# Altium PCB reflex_brainboard_RevG.PcbDoc (part 1 of 2)
Units mil, origin at the board's own origin, x right, y up, seen from the top; angles counter-clockwise.
Board outline 1299.21 x 1692.91 mil, 4 copper layers (Top Layer, Ground pour, PowerPour, Bottom Layer), stack 61.2 mil thick; 127 components, 95 nets, 488 pads, 161 vias.
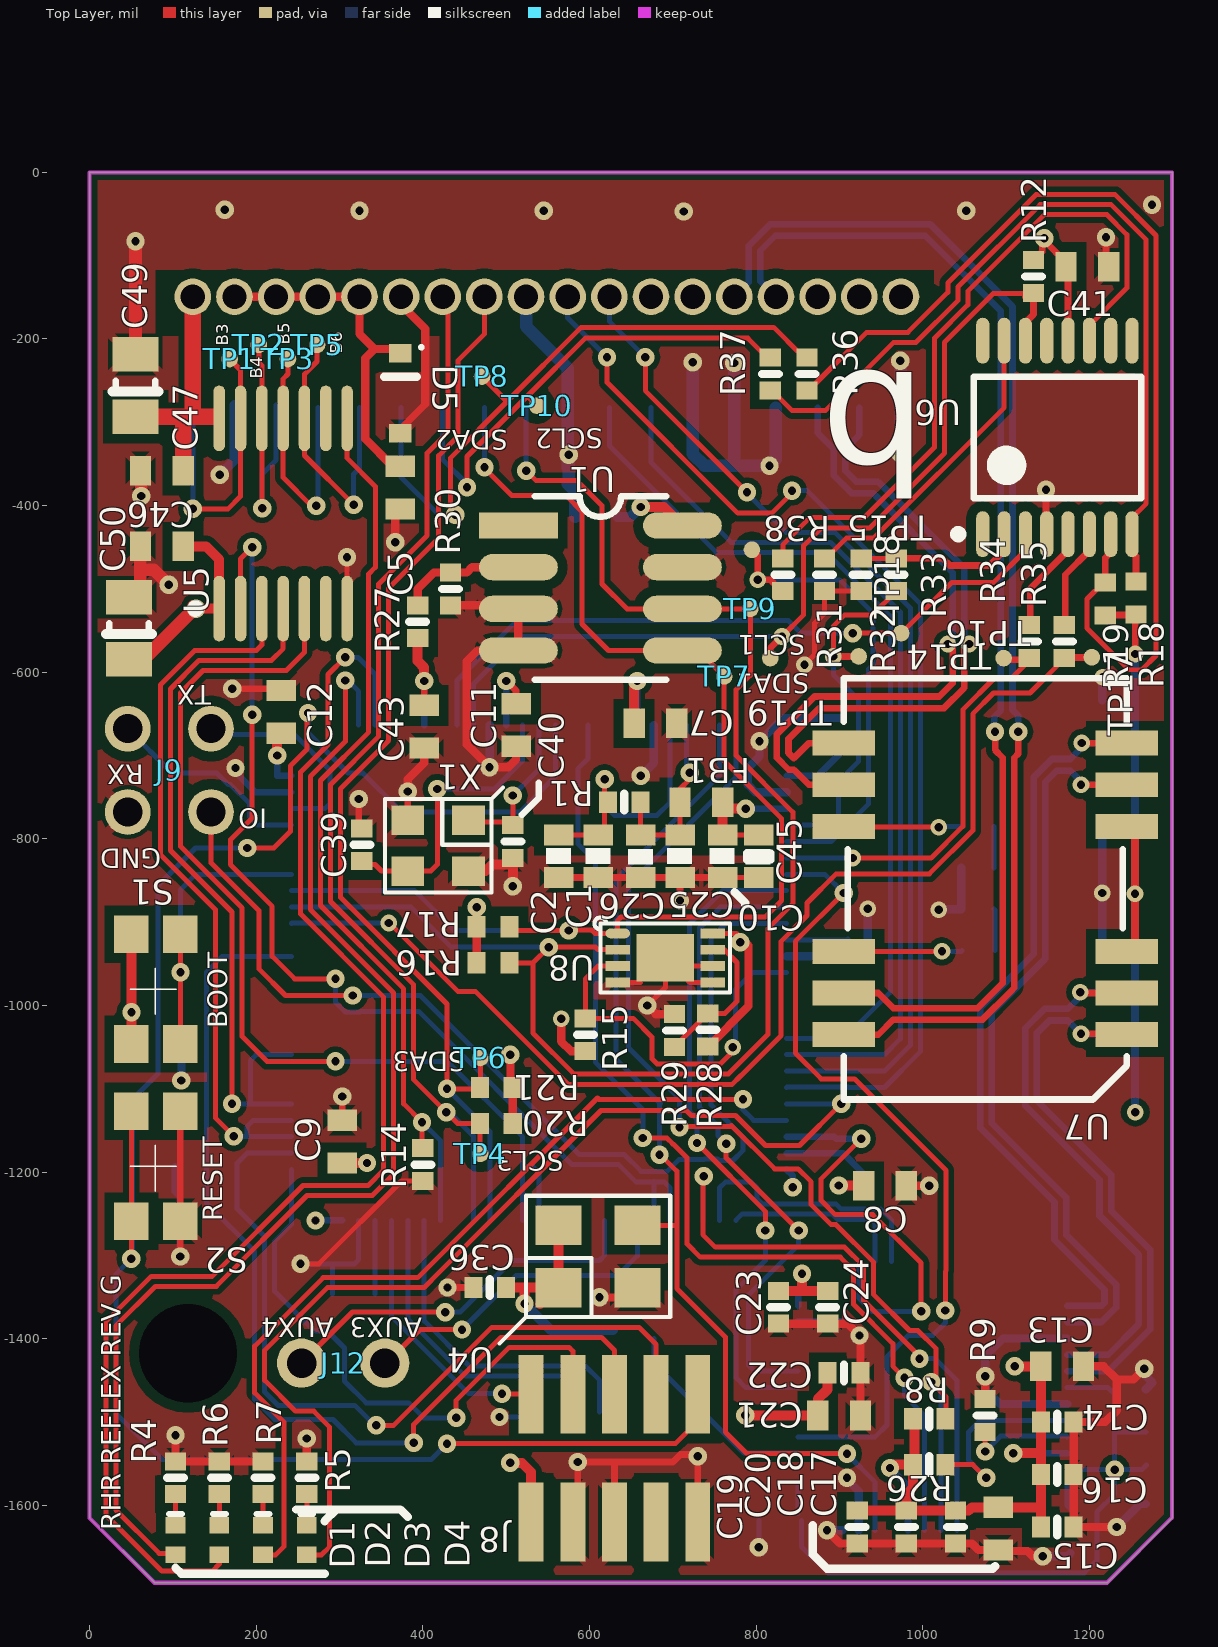
[diagram p0: Top Layer view]
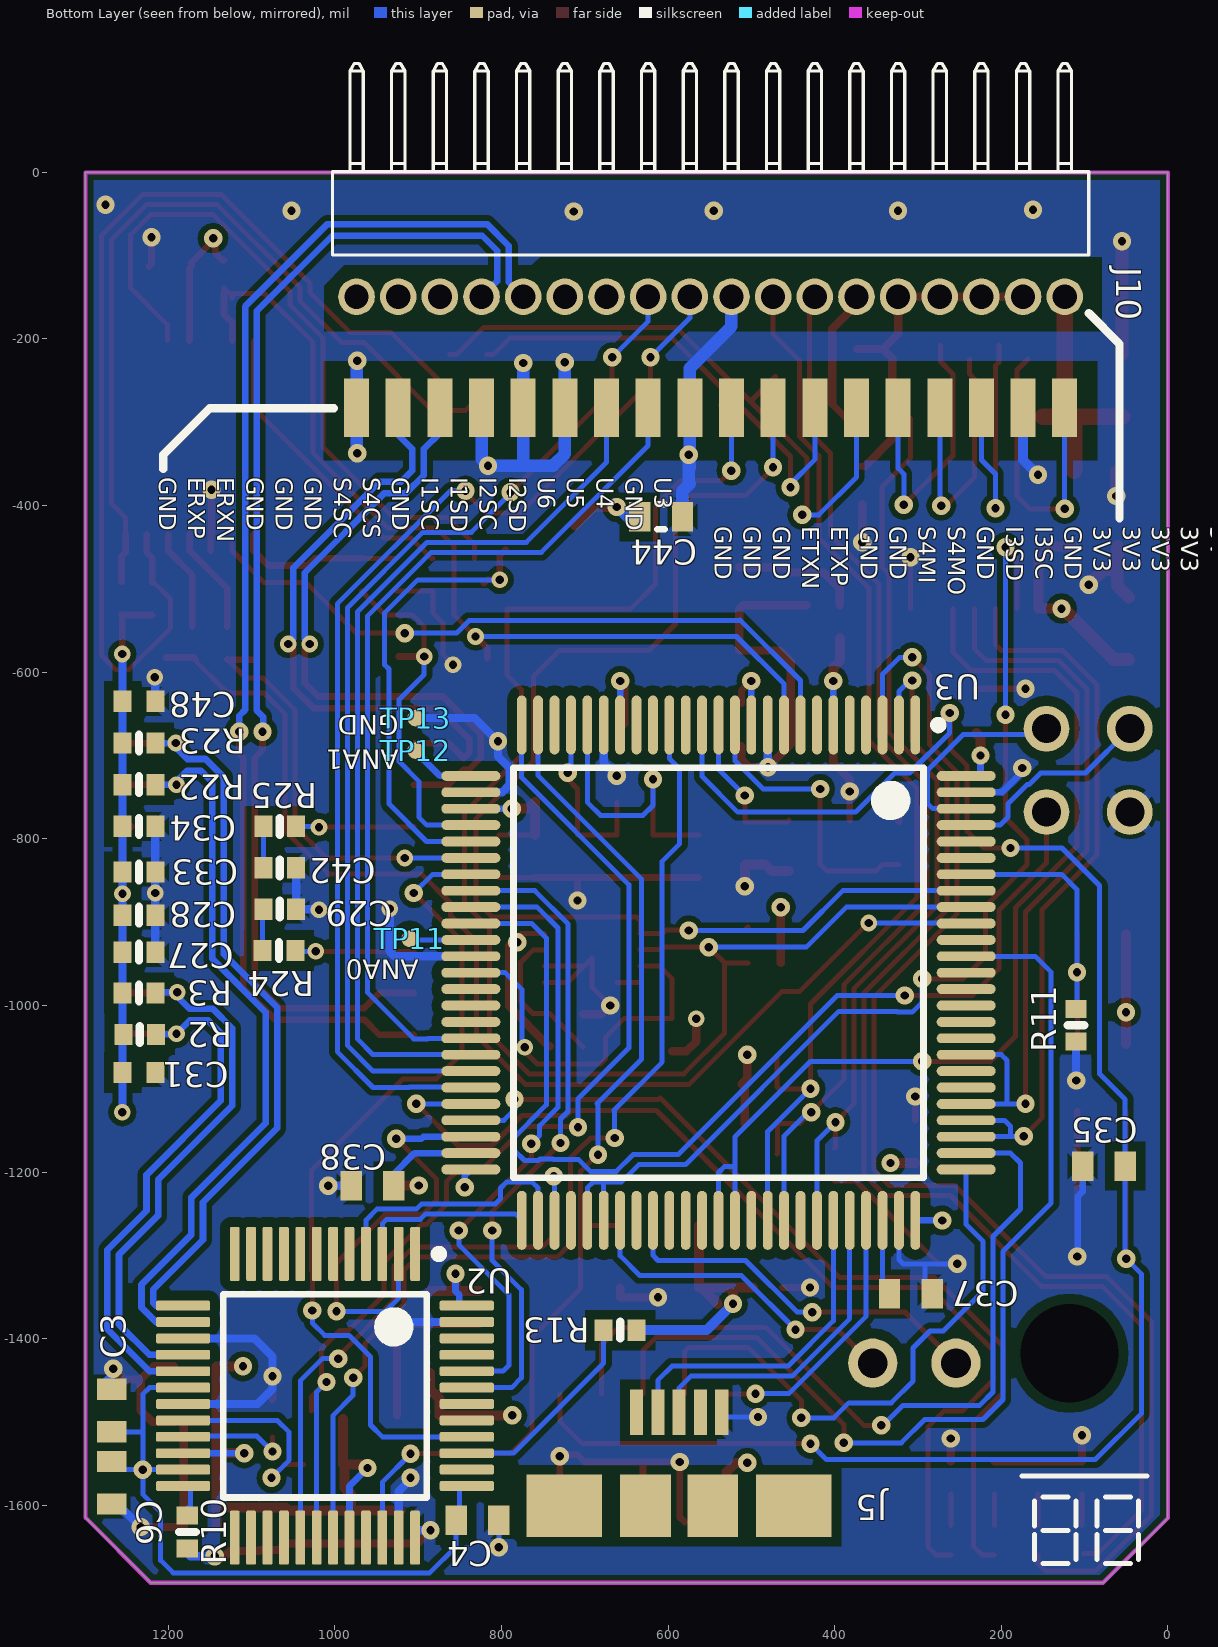
[diagram p1: Bottom Layer view, seen from below]
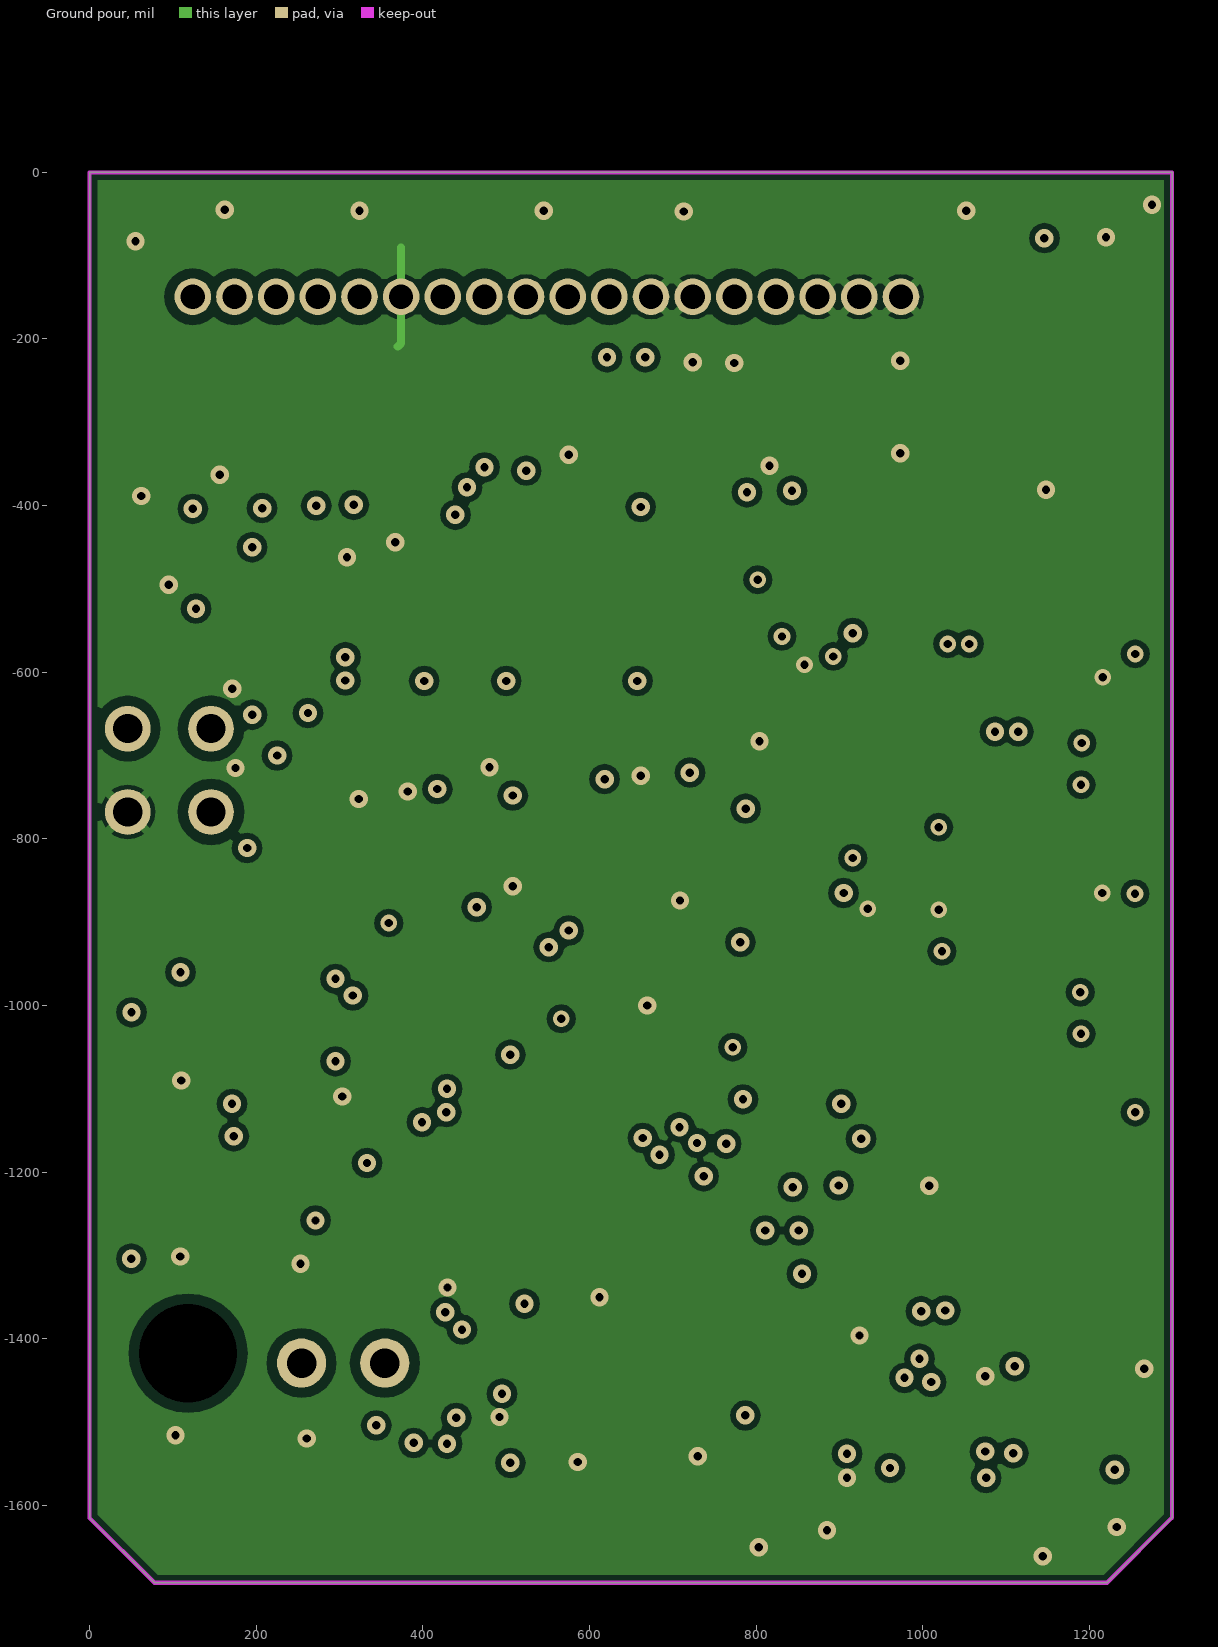
[diagram p2: Ground pour]
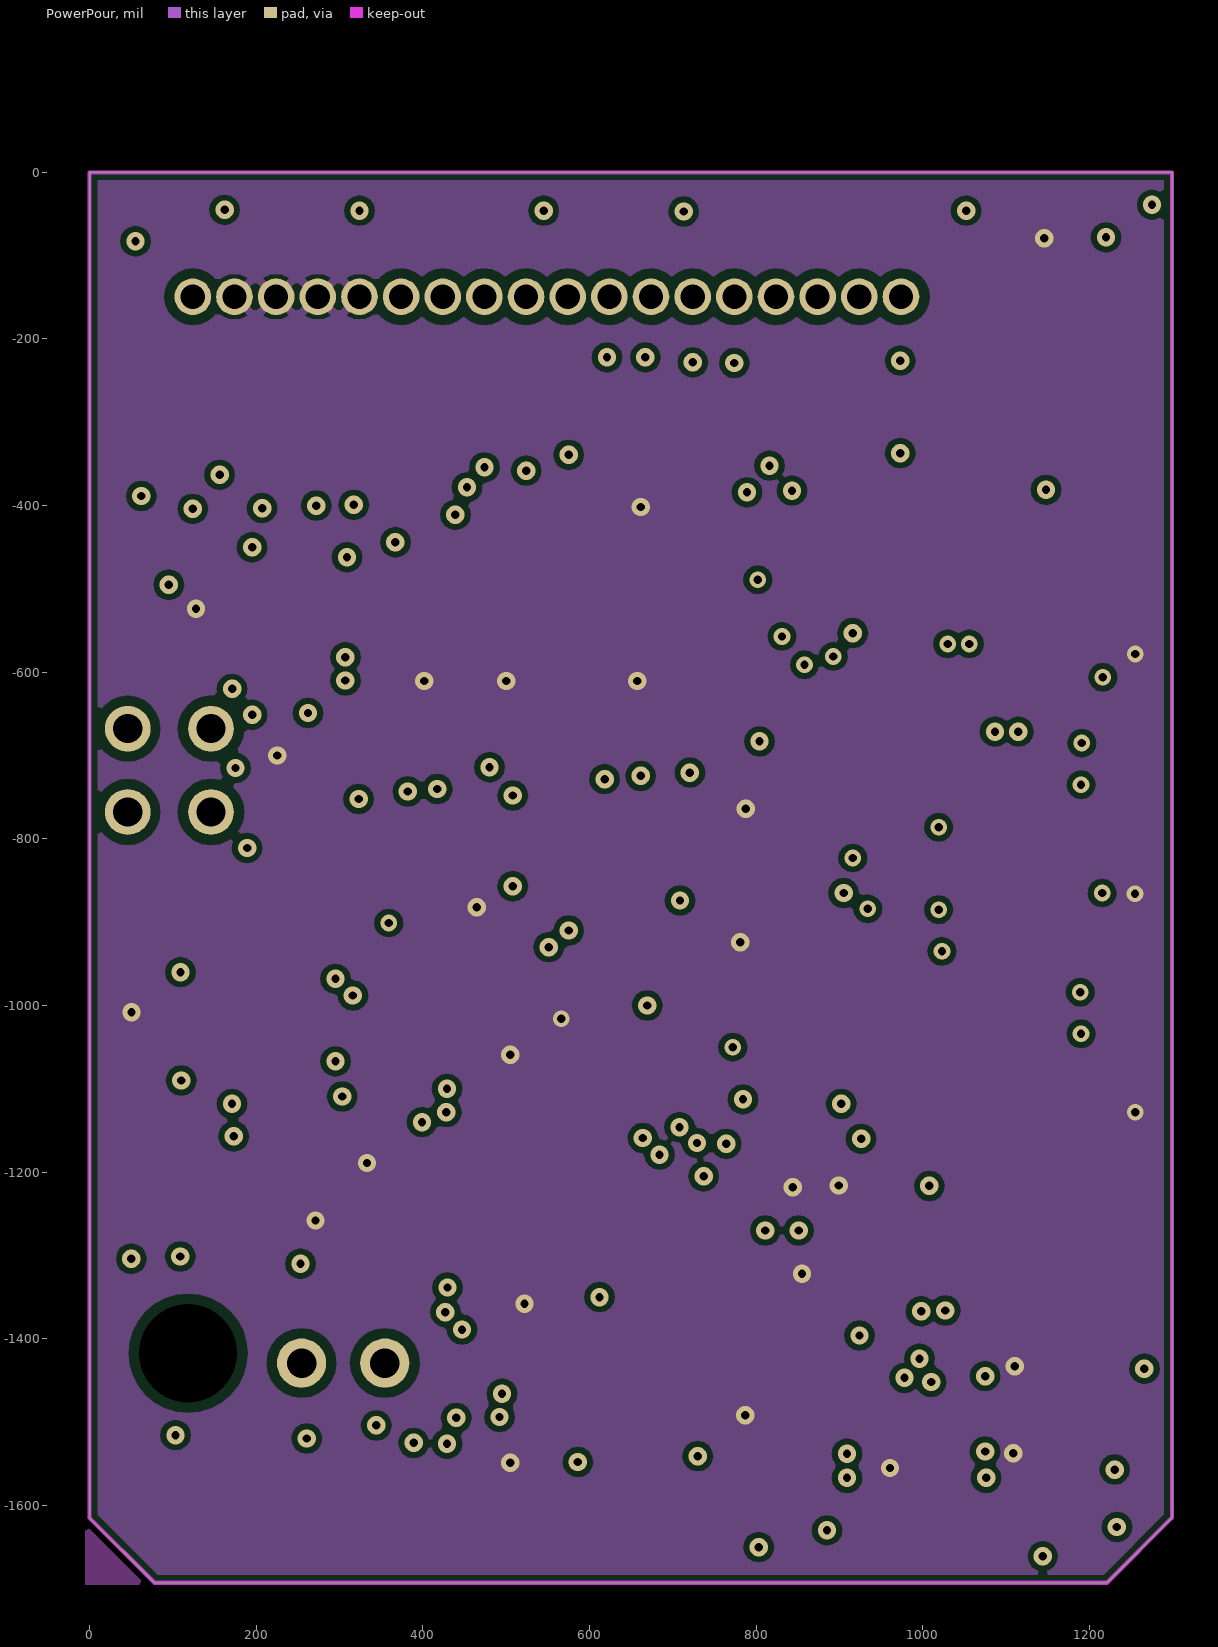
[diagram p3: PowerPour]

## Layer stack, top to bottom
Top Solder: solder mask 0.4, Solder Resist, Dk 3.5
Top Layer: signal copper 1.4
Dielectric 1: core 25, FR-4, Dk 4.2
Ground pour: signal copper 1.417
Dielectric 3: core 25.566, Dk 4.2
PowerPour: signal copper 1.417
Dielectric 4: prepreg 5, Dk 4.2
Bottom Layer: signal copper 1.4
Bottom Solder: solder mask 0.4, Solder Resist, Dk 3.5

## Board outline
0,-1615 77.91,-1692.91 1221.09,-1692.91 1299.21,-1614.79 1299.21,0 0,0

## Design rules (kind name [scope] priority, off if disabled: settings)
Clearance Clearance_Poly [InPoly] p1: gap=7 ignorepadtopadclearanceinfootprint=FALSE except(0: Arc-Hole Track-Hole SMDPad-Hole THPad-Hole Via-Hole Fill-Hole Poly-Hole Region-Hole Text-Hole; 12: SMDPad-Poly THPad-Poly)
Clearance [All] p2: gap=6 ignorepadtopadclearanceinfootprint=FALSE except(0: Arc-Hole Track-Hole SMDPad-Hole THPad-Hole Via-Hole Fill-Hole Poly-Hole Region-Hole Text-Hole)
DiffPairsRouting [All] p1: maxlimit=10 minlimit=6 mostfreqgap=6 toplayer_minwidth=7.87 toplayer_maxwidth=15 toplayer_prefwidth=15 midlayer1_minwidth=7.87 midlayer1_maxwidth=15 midlayer1_prefwidth=15 midlayer2_minwidth=7.87 midlayer2_maxwidth=15 midlayer2_prefwidth=15 bottomlayer_minwidth=7.87 bottomlayer_maxwidth=15 bottomlayer_prefwidth=15 maxuncoupledlength=500
HoleSize [All] p1: absolutevalues=TRUE maxlimit=11811.02 minlimit=1 maxpercent=80.000 minpercent=20.000
MinimumAnnularRing [All] p1: minimumring=5
MinimumSolderMaskSliver [All] p1: minsoldermaskwidth=0
PlaneClearance [All] p1: clearance=10
PlaneConnect [All] p1: planeconnectstyle=Relief reliefexpansion=10 reliefentries=4 reliefconductorwidth=12 reliefairgap=5
PolygonConnect via_connect [IsVia] p1: connectstyle=Direct reliefconductorwidth=10 reliefentries=4 polygonreliefangle="90 Angle" airgapwidth=10
PolygonConnect [All] p2: connectstyle=Relief reliefconductorwidth=10 reliefentries=4 polygonreliefangle="45 Angle" airgapwidth=5
RoomDefinition reflex_brainboard_RevG [InComponentClass('reflex_brainboard_RevG')] p1 off: confinementstyle=ConfineIn formatcopy=TRUE lockcomponents=FALSE outline -8,240 0,232 1309,232 1309,-1981 1302,-1988 -16,-1988
RoutingVias [All] p1: holewidth=10 width=20 viastyle="Through Hole" minholewidth=10 minwidth=20 maxholewidth=28 maxwidth=50
SilkToBoardRegionClearance [All] p1 off:
SilkToSilkClearance [All] p1 off: silktosilkclearance=10
SilkToSolderMaskClearance [IsPad] p1: minsilkscreentomaskgap=0 clearancetoexposedcopper=TRUE
SolderMaskExpansion [All] p1: expansion=2 istentingtop=FALSE
Width [All] p1: maxlimit=100 minlimit=6 preferedwidth=8 midlayer1_minwidth=8 midlayer2_minwidth=8 minimp=50.000000 maximp=50.000000 favimp=50.000000
22 further rules are at their usual default settings.

## Classes and differential pairs
differential pair ETH_RX: +ETH_RX_P -ETH_RX_N
differential pair ETH_TX: +ETH_TX_P -ETH_TX_N
differential pair PHY_RX: +PHY_RX_P -PHY_RX_N
differential pair PHY_TX: +PHY_TX_P -PHY_TX_N

## Components (designator, comment, footprint, x,y, rotation, side; value= is the part's Value field where it differs from the comment)
C1 "0.1uF 25V" GENERIC_0603#1 610.24,-846.46 r90 top locked
C2 "Cap_0603_10uF" GENERIC_0603#1 562.99,-846.46 r90 top locked value=10u
C3 "0.1uF 25V" GENERIC_0603#1 1267.72,-1511.81 r90 bottom locked
C4 "0.1uF 25V" GENERIC_0603#1 803.15,-1618.11 r0 bottom locked
C5 "Cap_0603_10uF" GENERIC_0603#1 373,-404 r90 top value=10u
C6 "Cap_0603_10uF" GENERIC_0603#1 1267.72,-1598.43 r90 bottom value=10u
C7 "0.1uF 25V" GENERIC_0603#1 704.72,-661.42 r180 top locked
C8 "0.1uF 25V" GENERIC_0603#1 980.32,-1216.54 r180 top locked
C9 "0.1uF 25V" GENERIC_0603#1 303.15,-1137.8 r270 top locked
C10 "0.1uF 25V" GENERIC_0603#1 759.84,-846.46 r90 top locked
C11 "0.1uF 25V" GENERIC_0603#1 511.81,-688.98 r90 top locked
C12 "0.1uF 25V" GENERIC_0603#1 230,-622 r270 top locked
C13 "Cap_0603_10uF" GENERIC_0603#1 1192.91,-1433.07 r180 top locked value=10u
C14 "0.01uF" Generic_0402 1161.42,-1500 r180 top locked
C15 "0.001uF" Generic_0402 1161.42,-1625.98 r180 top locked
C16 "100pF" Generic_0402 1161.42,-1562.99 r180 top locked
C17 "Cap_0603_10uF" GENERIC_0603#1 1090.55,-1653.54 r90 top locked value=10u
C18 "0.01uF" Generic_0402 1039.37,-1625.98 r90 top locked
C19 "0.001uF" Generic_0402 921.26,-1625.98 r90 top locked
C20 "100pF" Generic_0402 980.31,-1625.98 r90 top locked
C21 "Cap_0603_10uF" GENERIC_0603#1 925.2,-1492.13 r180 top locked value=10u
C22 "0.01uF" Generic_0402 905.51,-1440.94 r180 top locked
C23 "0.001uF" Generic_0402 826.77,-1362.2 r90 top locked
C24 "100pF" Generic_0402 885.83,-1362.2 r90 top locked
C25 "0.1uF 25V" GENERIC_0603#1 708.66,-846.46 r90 top locked
C26 "Cap_0603_10uF" GENERIC_0603#1 661.42,-846.46 r90 top locked value=10u
C27 "1u" Generic_0402 1235,-936 r0 bottom
C28 "0.1uF" Generic_0402 1235,-891.48 r0 bottom value="0.1uF 50V"
C29 "0.001uF" Generic_0402 1066,-884.33 r0 bottom
C31 "0.1uF" GENERIC_0402 1235,-1080.42 r0 bottom value="0.1uF 50V"
C33 "1u" Generic_0402 1235,-839.86 r0 bottom
C34 "0.1uF" Generic_0402 1235,-785 r0 bottom value="0.1uF 50V"
C35 "0.1uF 25V" GENERIC_0603#1 102.36,-1192.91 r180 bottom locked
C36 "0.01uF" Generic_0402 480.32,-1338.58 r0 top locked
C37 "2.2uF 10V" GENERIC_0603#1 283,-1346 r0 bottom locked
C38 "2.2uF 10V" GENERIC_0603#1 980.31,-1216.54 r180 bottom locked
C39 "18pF" Generic_0402 326.77,-807.09 r90 top locked
C40 "18pF" Generic_0402 507.87,-803.15 r270 top locked
C41 "2.2uF 10V" GENERIC_0603#1 1223.18,-113 r180 top
C42 "0.001uF" Generic_0402 1066,-834.67 r0 bottom
C43 "0.1uF 25V" GENERIC_0603#2 401.57,-665.35 r90 top locked
C44 "0.1uF 25V" Generic_0603 582.68,-413.39 r0 bottom locked
C45 "0.1uF 25V" Generic_0603 803.15,-846.46 r90 top locked
C46 "0.1uF 25V" GENERIC_0603#2 86.61,-448.82 r180 top locked
C47 "0.1uF 25V" GENERIC_0603#2 86.61,-358.27 r0 top locked
C48 "0.1uF" GENERIC_0402 1235,-635 r0 bottom value="0.1uF 50V"
C49 "10uF" GENERIC_0805P 55.12,-255.91 r90 top locked
C50 "10uF" GENERIC_0805P 47.24,-547.24 r90 top locked
D1 "LED White" 0402_LED_WHITE 103.12,-1641.73 r0 top locked value=White
D2 "LED White" 0402_LED_WHITE 155.61,-1641.73 r0 top locked value=White
D3 "LED White" 0402_LED_WHITE 208.1,-1641.73 r0 top locked value=White
D4 "LED White" 0402_LED_WHITE 260.6,-1641.73 r0 top locked value=White
D5 "ESDLC3V3D3-TP" SOD-323 373,-265 r270 top
FB1 "MPZ1608S221A" GENERIC_0603#1 759.84,-755.91 r180 top locked
J5 "10104110-0001LF" FCI-10104110 586.61,-1488.19 r180 bottom locked
J8 "DNP" CNCTECH_3220-10-0300-00 629.92,-1543.31 r90 top locked
J9 "67996-104HLF" HDR2X2 145.67,-767.72 r90 top locked
J10 "FTSH-118-01-L-MT" FTSH-118-01-L-MT 548.82,-149.29 r180 bottom locked
J12 "77311-118-02LF" HDR1X2 354.33,-1429.13 r180 top locked
R1 "10" Generic_0402 641.73,-755.91 r0 top locked
R2 "Res_0402_49p9_1pct" Generic_0402 1234,-1034.74 r0 bottom value=49p9
R3 "Res_0402_49p9_1pct" Generic_0402 1235,-985 r0 bottom value=49p9
R4 "330" Generic_0402 103.12,-1566.93 r270 top locked
R5 "330" Generic_0402 260.6,-1566.93 r270 top locked
R6 "330" Generic_0402 155.61,-1566.93 r270 top locked
R7 "330" Generic_0402 208.1,-1566.93 r270 top locked
R8 "Res_0402_2.2K" Generic_0402 1007.87,-1496.06 r0 top locked value=2.2K
R9 "Res_0402_10K_1pct" Generic_0402 1074.8,-1492.13 r270 top locked value=10K
R10 "4.87k 1%" Generic_0402 1177,-1632 r90 bottom locked
R11 "Res_0402_10K_1pct" Generic_0402 110.24,-1023.62 r90 bottom locked value=10K
R12 "Res_0402_10K_1pct" Generic_0402 1133,-125 r90 top value=10K
R13 "Res_0402_2.2K" Generic_0402 657.48,-1389.76 r180 bottom locked value=2.2K
R14 "Res_0402_10K_1pct" Generic_0402 400,-1191 r90 top locked value=10K
R15 "Res_0402_10K_1pct" Generic_0402 595,-1035.15 r270 top value=10K
R16 "Res_0402_2.2K" GENERIC_0402 484.25,-948.82 r180 top locked value=2.2K
R17 "Res_0402_2.2K" GENERIC_0402 484.25,-905.51 r180 top locked value=2.2K
R18 "Res_0402_2.2K" GENERIC_0402 1256,-511 r270 top value=2.2K
R19 "Res_0402_2.2K" GENERIC_0402 1219,-512 r270 top value=2.2K
R20 "Res_0402_2.2K" GENERIC_0402 488.19,-1141.73 r0 top locked value=2.2K
R21 "Res_0402_2.2K" GENERIC_0402 488.19,-1098.43 r0 top locked value=2.2K
R22 "Res_0402_49p9_1pct" Generic_0402 1235,-735 r180 bottom value=49p9
R23 "Res_0402_49p9_1pct" Generic_0402 1235,-685 r0 bottom value=49p9
R24 "75" Generic_0402 1067,-934 r0 bottom
R25 "75" Generic_0402 1066,-785 r0 bottom
R26 "Res_0402_2.2K" Generic_0402 1007.87,-1551.18 r180 top locked value=2.2K
R27 "Res_0402_DNP" Generic_0402 393.7,-539.37 r270 top locked value=DNP
R28 "Res_0402_DNP" Generic_0402 742.01,-1029.27 r270 top value=DNP
R29 "Res_0402_10K_1pct" Generic_0402 702,-1030 r270 top value=10K
R30 "Res_0402_10K_1pct" Generic_0402 433.07,-500 r90 top locked value=10K
R31 "Res_0402_10K_1pct" Generic_0402 882,-483 r90 top value=10K
R32 "Res_0402_DNP" Generic_0402 926,-483 r270 top value=DNP
R33 "Res_0402_0" Generic_0402 968,-483 r90 top value=0
R34 "Res_0402_49p9_1pct" Generic_0402 1128,-563 r90 top value=49p9
R35 "Res_0402_49p9_1pct" Generic_0402 1170,-563 r90 top value=49p9
R36 "Res_0402_49p9_1pct" Generic_0402 861,-242 r270 top value=49p9
R37 "Res_0402_49p9_1pct" Generic_0402 817,-242 r270 top value=49p9
R38 "Res_0402_49p9_1pct" Generic_0402 832,-483 r90 top value=49p9
S1 "EVP-AA402W" EVPAA402_switch 78.74,-980.31 r90 top locked
S2 "EVP-AA402W" EVPAA402_switch 78.74,-1192.91 r90 top locked
TP1 "SMT Pad" TP_PAD_20mil 168,-224 r90 top locked
TP2 "SMT Pad" TP_PAD_20mil 203,-207 r90 top locked
TP3 "SMT Pad" TP_PAD_20mil 238,-224 r90 top locked
TP4 "SMT Pad" TP_PAD_20mil 469,-1178 r90 top locked
TP5 "SMT Pad" TP_PAD_20mil 273,-207 r90 top locked
TP6 "SMT Pad" TP_PAD_20mil 469,-1063 r90 top locked
TP7 "SMT Pad" TP_PAD_20mil 761.63,-605 r90 top locked
TP8 "SMT Pad" TP_PAD_20mil 471,-245 r90 top
TP9 "SMT Pad" TP_PAD_20mil 793,-523.89 r90 top locked
TP10 "SMT Pad" TP_PAD_20mil 537,-280 r90 top
TP11 "SMT Pad" TP_PAD_20mil 910,-920 r180 bottom
TP12 "SMT Pad" TP_PAD_20mil 902.89,-694 r180 bottom
TP13 "SMT Pad" TP_PAD_20mil 902.89,-655 r180 bottom
TP14 "SMT Pad" TP_PAD_20mil 923,-581 r90 top
TP15 "SMT Pad" TP_PAD_20mil 795,-453 r90 top
TP16 "SMT Pad" TP_PAD_20mil 1097,-583 r90 top
TP17 "SMT Pad" TP_PAD_20mil 1203,-582 r90 top
TP18 "SMT Pad" TP_PAD_20mil 974,-553 r90 top
TP19 "SMT Pad" TP_PAD_20mil 817,-583 r90 top
U1 "CAT24M01WI-GT3" SOIC8 460.63,-381.89 r0 top locked
U2 "TLK110PT" PT0048A_M 1011.81,-1468.5 r270 bottom locked
U3 "STM32F427VIT6" STM-LQFP100_N 539.37,-960.63 r270 bottom locked
U4 "ASE-50.000MHZ-LCT" OSCILLATOR_3.2x2.5 562.99,-1338.58 r0 top locked
U5 "TXS0104EPWR" TXS0104EPWR 232.28,-409.45 r90 top locked
U6 "SC18IS600IPW/S8" SOT403-1-TSSOP16 1161.61,-318.14 r90 top
U7 "749020100" Wurth749020100 1075,-860 r180 top locked
U8 "MCP9804T" Temp_MCP9804T 633.86,-913.39 r270 top locked
X1 "8Z-25.000MEEQ-T" CRYSTAL_2_2.5 468.5,-767.72 r180 top locked

## Footprints (in the part's own frame and the unit in brackets; to place one, negate y for a bottom-side part, rotate by r counter-clockwise, add the part's x,y. Pads: shape width x height; smd on the part's side, far side on the other; paste and mask are expansions set on the pad)
0402_LED_WHITE [mm] "White LED land pattern"
  rect 0.6x0.5 smd paste+0 mask+0: 1(0,-0.45) 2(0,0.45)
  silkscreen extent -0.2,0.8 0.2,0.8
CNCTECH_3220-10-0300-00 [mm]
  rect 2.4x0.76 smd: 1(-1.95,2.54) 2(1.95,2.54) 3(-1.95,1.27) 4(1.95,1.27) 5(-1.95,0) 6(1.95,0) 7(-1.95,-1.27) 8(1.95,-1.27) 9(-1.95,-2.54) 10(1.95,-2.54)
  body extent -2.55,-5.6 2.55,5.6, height 5.4
CRYSTAL_2_2.5 [mm]
  rect 1x0.9 smd: 1(0.35,0.25) 2(2.2,0.25) 3(2.2,1.8) 4(0.35,1.8)
  silkscreen extent -0.7,-0.75 2.9,2.45, body extent 0.05,0.05 2.5,2, height 0.55
EVPAA402_switch [mm] "Reset Switch"
  rect 1.15x1.05 smd: 1(-1.675,0.725) 1_1(1.675,0.725) 2(-1.675,-0.763) 2_1(1.675,-0.763)
  silkscreen extent -0.76,-0.64 0.64,0.76, body extent -2.15,-1.56 2.15,1.55, height 1.65
FCI-10104110 [mm] "Micro USB B 2.0"
  rect 0.4x1.4 smd: 1(-1.3,0) 2(-0.65,0) 3(0,0) 4(0.65,0) 5(1.3,0)
  rect 2.3x1.9 smd: TAB(-3.5,-2.85) TAB_1(3.5,-2.85)
  rect 1.55x1.9 smd: TAB_2(-1.025,-2.85) TAB_3(1.025,-2.85)
FTSH-118-01-L-MT [mil] "18 pins/row dual row SMT/Thru RA header"
  round 44 hole 29 mask+2: 1(425,0) 3(375,0) 5(325,0) 7(275,0) 9(225,0) 11(175,0) 13(125,0) 15(75,0) 17(25,0) 19(-25,0) 21(-75,0) 23(-125,0) 25(-175,0) 27(-225,0) 29(-275,0) 31(-325,0) 33(-375,0) 35(-425,0)
  rect 30x70 smd mask+2: 2(425,-133.08) 4(375,-133.08) 6(325,-133.08) 8(275,-133.08) 10(225,-133.08) 12(175,-133.08) 14(125,-133.08) 16(75,-133.08) 18(25,-133.08) 20(-25,-133.08) 22(-75,-133.08) 24(-125,-133.08) 26(-175,-133.08) 28(-225,-133.08) 30(-275,-133.08) 32(-325,-133.08) 34(-375,-133.08) 36(-425,-133.08)
  silkscreen extent -454,50 454,280, body extent -450,-159 450,270, height 135
Generic_0402 [mm] "Chip Resistor, Body 1.0x0.5mm, IPC Medium Density"
  rect 0.55x0.65 smd: 1(-0.5,0) 2(0.5,0)
  silkscreen extent 0,-0.25 0,0.25, body extent -0.52,-0.27 0.53,0.28, height 0.4
GENERIC_0402 [mm] "Chip Resistor, Body 1.0x0.5mm, IPC Medium Density"
  rect 0.55x0.65 smd: 1(-0.5,0) 2(0.5,0)
  body extent -0.52,-0.27 0.53,0.28, height 0.4
GENERIC_0603#1 [mm]
  rect 0.65x0.9 smd: 1(0,0) 2(1.3,0)
  body extent -0.15,-0.4 1.45,0.4, height 0.35
GENERIC_0603#2 [mm]
  rect 0.65x0.9 smd: 1(-0.65,0) 2(0.65,0)
  body extent -0.8,-0.4 0.8,0.4, height 0.35
Generic_0603 [mm]
  rect 0.65x0.9 smd: 1(0,0) 2(1.3,0)
  silkscreen extent 0.53,-0.38 0.76,0.38, body extent -0.15,-0.4 1.45,0.4, height 0.35
GENERIC_0805P [mm] "generic 0805"
  rect 1.05x1.4 smd: 1(-0.95,0) 2(0.95,0)
  silkscreen extent -0.18,-0.7 0.15,0.7, body extent -1.1,-0.67 1.1,0.68, height 0.7
HDR1X2 [mm] "Connector; Header; 2 Position"
  round 1.5 hole 0.9: 1(0,0) 2(2.54,0)
HDR2X2 [mil] "Connector; Header; 2x2 Position"
  round 55 hole 35: 1(0,0) 2(0,100) 3(100,0) 4(100,100)
OSCILLATOR_3.2x2.5 [mm]
  rect 1.4x1.2 smd: 1(0,0) 2(2.4,0) 3(2.4,1.9) 4(0,1.9)
  silkscreen extent -1.8,-1.7 3.4,2.8, body extent -0.4,-0.3 2.8,2.2, height 1.05
PT0048A_M [mm] "QFP, 48-Leads, Body 7x7mm, Pitch 0.5mm, IPC Low Density"
  rrect33% 1.65x0.3 smd: 1(-4.325,2.75) 2(-4.325,2.25) 3(-4.325,1.75) 4(-4.325,1.25) 5(-4.325,0.75) 6(-4.325,0.25) 7(-4.325,-0.25) 8(-4.325,-0.75) 9(-4.325,-1.25) 10(-4.325,-1.75) 11(-4.325,-2.25) 12(-4.325,-2.75) 25(4.325,-2.75) 26(4.325,-2.25) 27(4.325,-1.75) 28(4.325,-1.25) 29(4.325,-0.75) 30(4.325,-0.25) 31(4.325,0.25) 32(4.325,0.75) 33(4.325,1.25) 34(4.325,1.75) 35(4.325,2.25) 36(4.325,2.75)
  rrect33% 0.3x1.65 smd: 13(-2.75,-4.325) 14(-2.25,-4.325) 15(-1.75,-4.325) 16(-1.25,-4.325) 17(-0.75,-4.325) 18(-0.25,-4.325) 19(0.25,-4.325) 20(0.75,-4.325) 21(1.25,-4.325) 22(1.75,-4.325) 23(2.25,-4.325) 24(2.75,-4.325) 37(2.75,4.325) 38(2.25,4.325) 39(1.75,4.325) 40(1.25,4.325) 41(0.75,4.325) 42(0.25,4.325) 43(-0.25,4.325) 44(-0.75,4.325) 45(-1.25,4.325) 46(-1.75,4.325) 47(-2.25,4.325) 48(-2.75,4.325)
  silkscreen extent -4.45,-3.1 3.1,3.6, body extent -4.51,-4.51 4.51,4.51, height 1.5
SOD-323 [mm] "SOD, 2-Leads, Body 1.25x2.50mm, IPC Medium Density"
  rect 0.56x0.68 smd: 1(-1.219,0) 2(1.219,0)
  silkscreen extent -1.45,-0.5 -0.5,0.69, body extent -0.9,-0.67 0.9,0.67, height 1.15
SOIC8 [mm] "JEDEC SOIC 3.9mm body width"
  rect 2.4x0.8 smd paste+0 mask+0: 1(1.372,-1.067)
  oval 2.4x0.8 smd paste+0 mask+0: 2(1.372,-2.337) 3(1.372,-3.607) 4(1.372,-4.877) 5(6.372,-4.877) 6(6.372,-3.607) 7(6.372,-2.337) 8(6.372,-1.067)
  silkscreen extent 1.87,-5.77 5.87,-0.17, body extent 0.8,-5.4 6.8,-0.5, height 1.75
SOT403-1-TSSOP16 [mm] "TSSOP16, 5x4.4x1.1mm body, .65mm pitch, 16 leads"
  oval 1.4x0.4 smd: 1(-2.95,2.275) 2(-2.95,1.625) 3(-2.95,0.975) 4(-2.95,0.325) 5(-2.95,-0.325) 6(-2.95,-0.975) 7(-2.95,-1.625) 8(-2.95,-2.275) 9(2.95,-2.275) 10(2.95,-1.625) 11(2.95,-0.975) 12(2.95,-0.325) 13(2.95,0.325) 14(2.95,0.975) 15(2.95,1.625) 16(2.95,2.275)
  silkscreen extent -3.07,-2.55 1.85,3.15, body extent -2.25,-2.55 2.25,2.55, height 1.1
STM-LQFP100_N [mm] "Thin QFP, 100-Leads, Body 14x14mm, Pitch 0.5mm, IPC Medium Density"
  oval 1.8x0.3 smd: 1(-7.55,6) 2(-7.55,5.5) 3(-7.55,5) 4(-7.55,4.5) 5(-7.55,4) 6(-7.55,3.5) 7(-7.55,3) 8(-7.55,2.5) 9(-7.55,2) 10(-7.55,1.5) 11(-7.55,1) 12(-7.55,0.5) 13(-7.55,0) 14(-7.55,-0.5) 15(-7.55,-1) 16(-7.55,-1.5) 17(-7.55,-2) 18(-7.55,-2.5) 19(-7.55,-3) 20(-7.55,-3.5) 21(-7.55,-4) 22(-7.55,-4.5) 23(-7.55,-5) 24(-7.55,-5.5) 25(-7.55,-6) 51(7.55,-6) 52(7.55,-5.5) 53(7.55,-5) 54(7.55,-4.5) 55(7.55,-4) 56(7.55,-3.5) 57(7.55,-3) 58(7.55,-2.5) 59(7.55,-2) 60(7.55,-1.5) 61(7.55,-1) 62(7.55,-0.5) 63(7.55,0) 64(7.55,0.5) 65(7.55,1) 66(7.55,1.5) 67(7.55,2) 68(7.55,2.5) 69(7.55,3) 70(7.55,3.5) 71(7.55,4) 72(7.55,4.5) 73(7.55,5) 74(7.55,5.5) 75(7.55,6)
  oval 0.3x1.8 smd: 26(-6,-7.55) 27(-5.5,-7.55) 28(-5,-7.55) 29(-4.5,-7.55) 30(-4,-7.55) 31(-3.5,-7.55) 32(-3,-7.55) 33(-2.5,-7.55) 34(-2,-7.55) 35(-1.5,-7.55) 36(-1,-7.55) 37(-0.5,-7.55) 38(0,-7.55) 39(0.5,-7.55) 40(1,-7.55) 41(1.5,-7.55) 42(2,-7.55) 43(2.5,-7.55) 44(3,-7.55) 45(3.5,-7.55) 46(4,-7.55) 47(4.5,-7.55) 48(5,-7.55) 49(5.5,-7.55) 50(6,-7.55) 76(6,7.55) 77(5.5,7.55) 78(5,7.55) 79(4.5,7.55) 80(4,7.55) 81(3.5,7.55) 82(3,7.55) 83(2.5,7.55) 84(2,7.55) 85(1.5,7.55) 86(1,7.55) 87(0.5,7.55) 88(0,7.55) 89(-0.5,7.55) 90(-1,7.55) 91(-1.5,7.55) 92(-2,7.55) 93(-2.5,7.55) 94(-3,7.55) 95(-3.5,7.55) 96(-4,7.55) 97(-4.5,7.55) 98(-5,7.55) 99(-5.5,7.55) 100(-6,7.55)
  silkscreen extent -7.67,-6.25 6.25,6.82, body extent -7,-7 7,7, height 1.6
Temp_MCP9804T [mm] "I2C Temp Sensor with Alert"
  rrect100% 0.3x0.75 smd paste+0 mask+0: 1(0,0)
  rect 0.3x0.75 smd paste+0 mask+0: 2(0.5,0) 3(1,0) 4(1.5,0) 5(1.5,2.9) 6(1,2.9) 7(0.5,2.9) 8(0,2.9)
  rect 1.45x1.75 smd paste+0 mask+0: 9(0.75,1.45)
  silkscreen extent -0.48,-0.71 1.8,3.42
TP_PAD_20mil [mil] "20 mil SMT testpad"
  round 20 smd mask+0: 1(0,0)
TXS0104EPWR [mm]
  oval 2x0.35 smd: 1(-2.9,1.95) 2(-2.9,1.3) 3(-2.9,0.65) 4(-2.9,0) 5(-2.9,-0.65) 6(-2.9,-1.3) 7(-2.9,-1.95) 8(2.9,-1.95) 9(2.9,-1.3) 10(2.9,-0.65) 11(2.9,0) 12(2.9,0.65) 13(2.9,1.3) 14(2.9,1.95)
  silkscreen extent -3.02,2.55 -2.78,2.8, body extent -2.25,-2.55 2.25,2.55, height 1.2
Wurth749020100 [mm] "Ethernet Magnetics"
  rect 1.91x0.76 smd: 1(-4.318,4.445) 2(-4.318,3.175) 3(-4.318,1.905) 6(-4.318,-1.905) 7(-4.318,-3.175) 8(-4.318,-4.445) 9(4.318,-4.445) 10(4.318,-3.175) 11(4.318,-1.905) 14(4.318,1.905) 15(4.318,3.175) 16(4.318,4.445)
  silkscreen extent -4.32,-6.42 4.32,6.42, body extent -3.3,-6.4 3.3,6.4, height 2.16

## Part data
C1 C3 C4 C7 C8 C9 C10 C11 C12 C25 C35 C43 C44 C45 C46 C47: library part Cap_0603_0.1uF_25V, "Capacitor 0.1uF 0603 package", Supplier Part Number 1=478-1244-1-ND, Supplier 1=Digi-Key, Supplier Unit Price 1=0.38, Supplier Unit Price 2=0.13
C2 C5 C6 C13 C17 C21 C26: "Capacitor", Case-EIA=0603, Manufacturer="TDK Corporation", Manufacturer Part Number=C1608X5R1E106M080AC, Supplier Part Number 1=445-9015-1-ND, Mouser=810-C1608X5R1E106M, PackageReference=0603, Supplier 1=Digi-Key, Supplier 2=Mouser, Supplier Part Number 2=810-C1608X5R1E106M
C14 C18 C22 C36: library part Cap_0402_0p01uF, "Capacitor 0.01uF 0402 package", Supplier Part Number 1=445-1262-1-ND, Supplier 1=Digi-Key, Supplier Unit Price 1=0.018, Supplier Unit Price 2=0.006
C15 C19 C23 C29 C42: library part Cap_0402_0p001uF, "Capacitor 0.001uF 0402 package", Supplier Part Number 1=311-1036-1-ND, Supplier 1=Digi-Key, Supplier 2=Newark, Supplier Part Number 2=74C3082
C16 C20 C24: library part Cap_0402_100pF, "Capacitor 100pF 0402 package", Supplier Part Number 1=490-3458-1-ND, Supplier 1=Digi-Key, Supplier Unit Price 1=0.01, Supplier Unit Price 2=0.00526
C27 C33: library part Cap_0402_1uF, "Capacitor", Supplier Part Number 1=445-4978-1-ND, Supplier 1=Digi-Key, Supplier 2=Mouser, Supplier Part Number 2=810-C1005X5R1C105K
C28 C31 C34 C48: library part Cap_0402_0p1uF_50V, "Capacitor 0.1uF 0402 package", Supplier Part Number 1=445-5933-1-ND, Supplier 1=Digi-Key, Supplier 2=Newark, Supplier Part Number 2=12T1864
C37 C38 C41: library part Cap_0603_2p2uF_10V, "Capacitor 2.2uF 0603 package", Supplier Part Number 1=587-1253-1-ND, Supplier 1=Digi-Key, Supplier 2=Newark, Supplier Part Number 2=18J2716
C39 C40: library part Cap_0402_18pF, "Capacitor 18pF 0402 package", Supplier Part Number 1=712-1264-1-ND, Supplier 1=Digi-Key
C49 C50: library part "Cap 0805P_10uF", "Polarized Capacitor (Radial)", Supplier Part Number 1=445-14388-1-ND, Supplier 1=Digi-Key, Supplier 2=Mouser, Supplier Part Number 2=810-C2012X5R1E106MAC
D1 D2 D3 D4: library part LED_White_0402, "Surface mount LEDs", Supplier Part Number 1=511-1616-1-ND, Supplier 1=Digi-Key, Supplier Unit Price 1=2.01, Supplier Unit Price 2=0.66
D5: library part Diode_ESDLC3V3D3-TP, Manufacturer="Micro Commercial Co", Supplier Part Number 1=ESDLC3V3D3-TPMSCT-ND, Supplier 1=Digi-Key, Supplier 2=Mouser, Supplier Part Number 2=833-ESDLC3V3D3-TP
FB1: library part FerriteBead, "Ferrite Bead", Manufacturer="TDK Corporation", Supplier Part Number 1=445-172893-1-ND, Manufacturer Part Number=MPZ1608S221A, Mouser=810-MPZ1608S221A, PackageReference=0603, Supplier 1=Digi-Key, Supplier 2=Mouser, Supplier Part Number 2=810-MPZ1608S221A
J5: library part Conn_USB_Micro, "USB Micro Connector", Supplier Part Number 1=609-4052-1-ND, Supplier 1=Digi-Key
J8: library part "Header 5X2", "Header, 5-Pin, Dual row", Supplier Part Number 1=609-3729-ND, Supplier 1=Digi-Key, Supplier 2=Mouser, Supplier Part Number 2=649-221121-00010T4LF
J9: library part "Header 2X2", "Header, 2-Pin, Dual row", Supplier Part Number 1=609-3201-ND, Supplier 1=Digi-Key, Supplier 2=Mouser, Supplier Part Number 2=649-67996-104H
J10: library part "Header 18X2 RA MT", "Header, 18-Pin, Dual row, Hybrid SMT/Thru", Supplier Part Number 1=SAM1162-18-ND, Supplier 1=Digi-Key
J12: library part "Header 2", "Header, 2-Pin", Supplier Part Number 1=609-4434-ND, Supplier 1=Digi-Key, Supplier 2=Mouser, Supplier Part Number 2=649-77311-118-02LF
R1: library part Res_0402_10_1pct, "Resistor  10 ohm", Supplier Part Number 1=P10.0LCT-ND, Supplier 1=Digi-Key, Supplier 2=Mouser, Supplier Part Number 2=667-ERJ-2RKF10R0X
R2 R3 R22 R23 R34 R35 R36 R37 R38: "Resistor 49.9 ohm", Supplier Part Number 1=1276-3469-1-ND, Supplier 1=Digi-Key
R4 R5 R6 R7: library part Res_0402_330, "RES 330 OHM 1/10W 1% 0402 SMD", Supplier Part Number 1=P330LCT-ND, Supplier 1=Digi-Key, Supplier 2=Newark, Supplier Part Number 2=64R5277
R8 R13 R16 R17 R18 R19 R20 R21 R26: "Resistor 2.2 Kohm", Supplier Part Number 1=P2.2KJCT-ND, Supplier 1=Digi-Key, Supplier Unit Price 1=0.05, Supplier Unit Price 2=0.0048
R9 R11 R12 R14 R15 R29 R30 R31: "Resistor 10 Kohm", Supplier Part Number 1=P10.0KLCT-ND, Supplier 1=Digi-Key, Supplier 2=Newark, Supplier Part Number 2=64R5248
R10: library part Res_0402_4p87K_1pct, "75R 0.063W 5% 0402 (1005 Metric)  SMD", Supplier Part Number 1=P4.87KLCT-ND, Supplier 1=Digi-Key, Supplier 2=Mouser, Supplier Part Number 2=667-ERJ-2RKF4871X
R24 R25: library part Res_0402_75_1pct, "75R 0.063W 5% 0402 (1005 Metric)  SMD", Supplier Part Number 1=541-75.0LCT-ND, Supplier 1=Digi-Key
R27 R28 R32: "Resistor 0402 DNP"
R33: "RES SMD 0 OHM JUMPER 1/10W 0402", Supplier Part Number 1=P0.0JCT-ND, Supplier 1=Digi-Key, Supplier Unit Price 1=0.05, Supplier Unit Price 2=0.0048
S1 S2: library part Pushbutton_EVP-AA402W, "Momentary Push button, NO", Supplier Part Number 1=P13349SCT-ND, Supplier 1=Digi-Key, Supplier 2=Mouser, Supplier Part Number 2=667-EVP-AA402W
TP1 TP2 TP3 TP4 TP5 TP6 TP7 TP8 TP9 TP10 TP11 TP12 TP13 TP14 TP15 TP16 TP17 TP18 TP19: library part TP_SMT_20mil, "SMT pad for test"
U1: library part IC_EEPROM_I2C_1Mbit, "I2C EEPROM 1Mbit", Supplier Part Number 1=CAT24M01WI-GT3OSCT-ND, Supplier 1=Digi-Key, Supplier 2=Mouser, Supplier Part Number 2=863-CAT24M01WI-GT3
U2: library part CMP-0302-00001-2, "Industrial Temp, Single Port 10/100 Mb/s Ethernet Physical Layer Transceiver, -40 to 85 degC, 48-Pin LQFP (PT), Green (RoHS & no Sb/Br)", SupplyVoltage(Volt)=3.3, Cable Length(m)=150, ComponentLink1Description="Manufacturer URL", ComponentLink1URL=www.ti.com, ComponentLink2Description=Datasheet, ComponentLink2URL=http://www.ti.com/general/docs/lit/getliterature.tsp?genericPartNumber=TLK110&fileType=pdf, ComponentLink3Description="Package Specification", ComponentLink3URL=http://www.ti.com/litv/pdf/mtqf003a, DatasheetVersion=SLLS901A, Interface="MII, RMII", JTAG1149.1=Yes, LED(#)=3, PackageDescription="48-Pin Plastic Quad Flat Pack, 7 x 7 mm Body, 0.5 mm Pitch", PackageReference=PT0048A, PackageVersion="revC, Nov-1996", Port Count=Single, Special Features="Cable Diagnostics", SubFamily=PHY
U3: library part MC-ARM-STM32F4X7-SQ100, "ARM Cortex-M4 32-bit MCU+FPU, 210 DMIPS, 2048 kB Flash, 256 kB Internal RAM, 82 I/Os, 100-pin LQFP, -40 to 85 degC, Tray", I/Os (High Current)=82, Manufacturer=STMicroelectronics, Operating Frequency(F) (Processor speed) (MHz)=168, Supplier Part Number 1=497-14049-ND, Supply Voltage(Vcc) max (V)=3.6, Supply Voltage(Vcc) min (V)=1.8, ComponentLink1Description="Manufacturer URL", ComponentLink1URL=http://www.st.com/web/en/home.html, ComponentLink2Description=Datasheet, ComponentLink2URL=http://www.st.com/st-web-ui/static/active/en/resource/technical/document/datasheet/DM00071990.pdf, ComponentLink3Description="Package Specification", ComponentLink3URL=http://www.st.com/st-web-ui/static/active/en/resource/technical/document/data_brief/DM00071938.pdf, Core="ARM Cortex-M4", D/A Converter=2x12-bit, DatasheetVersion="Rev. 1", FLASH Size (Prog) (kB)=2048, Internal RAM Size (kB)=256, Manufacturer Part Number=STM32F427VIT6, Mounting Technology="Surface Mount", Mouser=511-STM32F427VIT6, PackageDescription="100-Pin Low Profile Quad Flat Package, 14 x 14 mm Body, 0.5 mm Pitch", PackageReference=LQFP100, PackageVersion="Rev. 1, 06/2013", Packing=Tray, PartNumber=STM32F427VIT6, Supplier 1=Digi-Key, Supplier 2=Mouser, Supplier Part Number 2=511-STM32F427VIT6
U4: library part oscillator_3.2x2.5, Supplier Part Number 1=535-9577-1-ND, Supplier 1=Digi-Key, Supplier 2=Mouser, Supplier Part Number 2=815-ASE-50.000MLCT
U5: library part IC_LevelShifter_TXS0104EPWR, "Level Shifter", Supplier Part Number 1=296-20697-1-ND, Supplier 1=Digi-Key, Supplier 2=Mouser, Supplier Part Number 2=595-TXS0104EPWR
U6: "SPI to I2C-bus interface"
U7: library part IC_EthernetMagnetics, "Ethernet Magnetics Wurth 749020100", Supplier Part Number 1=732-3268-1-ND, Supplier 1=Digi-Key, Supplier 2=Newark, Supplier Part Number 2=08P2951
U8: library part IC_Temp_Sensor_MCP9804_I2C, "I2C Temp Sensor MCP9804T-E/MC", Supplier Part Number 1=MCP9804T-E/MCCT-ND, Supplier 1=Digi-Key
X1: library part CRYSTAL, Supplier Part Number 1=887-1339-1-ND, Supplier 1=Digi-Key, Supplier 2=Mouser, Supplier Part Number 2=717-8Z-25.000MEEQ-T

## Free pads (board coordinates)
  round 105 hole 118.11: Drill(118.11,-1417.32)

## Via types
v1: diameter 22, hole 10, Top Layer to Bottom Layer, tented both sides, 138 vias
v2: diameter 20, hole 10, Top Layer to Bottom Layer, tented both sides, 23 vias

## Nets (pads, with @x,y where several pads share a name; then routed paths per layer and width w, separated by ;. In a path a pad name is that pad's centre, name@x,y a point inside that pad or via, vN(x,y) a via of type N, cw(c..) or ccw(c..) an arc to the next point about the centre after c; other vN are vias at no path point)
3V3: C5.2 C7.2 C8.2 C9.2 C10.2 C11.2 C12.2 C13.2 C14.2 C15.2 C16.2 C17.2 C18.2 C19.2 C20.2 C21.2 C22.2 C23.2 C24.2 C27.2 C28.2 C31.2 C33.2 C34.2 C36.2 C41.2 C43.2 C44.2 C45.2 C46.1 C48.2 C50.1 D5.1 FB1.1 J8.1 J10.3 J10.5 J10.7 J10.9 R2.2 R3.2 R8.1 R12.2 R13.2 R15.2 R16.2 R17.2 R18.2 R19.2 R20.2 R21.2 R22.1 R23.2 R26.2 R27.2 R28.2 S1.1 U1.8 U2.22 U2.32 U2.48 U3.6 U3.11 U3.19 U3.28 U3.50 U3.75 U3.100 U4.1 U4.4 U5.1 U6.12 U7.3 U7.6 U8.8 | length 4365.7
  Top Layer w6: U8.8@748.03,-913.39 776.32,-913.39 781,-918.07 v1(781,-924) ; C10.2@759.84,-795.28 C45.2@803.15,-795.28
  Top Layer w8: C5.2@363.82,-352.82 C5.2@373,-352.82 ; C43.2@401.57,-639.76 v1(401.57,-610.48) ; v1(500,-610.48) 500.24,-610.48 511.81,-622.05 C11.2@511.81,-637.8 ; R12.2@1133,-105.31 1134.97,-105.31 1141.8,-98.49 1141.8,-96.52 1143.32,-94.99 1143.32,-81.68 v1(1146,-79) 1146,-82.08 1172,-108.08 C41.2@1172,-113 1174.41,-115.41 U6.12@1174.41,-202 ; R19.2@1219,-531.69 1219.5,-531.19 1255.5,-531.19 R18.2@1256,-530.69 ; v2(1255,-578) 1255,-533.19 R18.2@1256.25,-531.94
  Top Layer w9.84: R16.2@464.57,-948.82 R17.2@464.57,-905.51 v1(464.57,-881.89) ; v1(505,-1059) 505,-1087.68 511.81,-1094.49 R21.2@507.87,-1098.43 R20.2@507.87,-1141.73 ; v2(566,-1016) 566,-1043 577.83,-1054.83 R15.2@595,-1054.83 ; R28.2@742.01,-1048.96 742.73,-1048.96 790.92,-1000.77 790.92,-927.99 786.93,-924 v1(781,-924) ; U7.6@1245,-785 1254.69,-794.69 v2(1254.69,-865.69) U7.3@1254.69,-925.31
  Top Layer w10: J10.3@173.82,-149.29 J10.9@323.82,-149.29 323.82,-193.82 342,-212 ; C5.2@363.82,-352.82 331,-320 331,-223 342,-212 ; D5.1@373,-212 342,-212
  Top Layer w12: S1.1@50.2,-1046.26 v1(50.2,-1008.2) 50,-1008 50.2,-1007.8 50.2,-914.37 ; C46.1@112.2,-448.82 139.82,-448.82 155.51,-464.51 U5.1@155.51,-523.62 v1(127.62,-523.62) v1@125,-521 ; v1(225,-700) 225,-678.18 C12.2@230,-673.18 ; C9.2@303.17,-1189 v1(333,-1189) ; R27.2@393.7,-559.06 393.7,-586.61 401.57,-594.49 v1(401.57,-610.48) ; C36.2@498.03,-1338.58 U4.1@562.99,-1338.58 ; v1(505,-1549) 519,-1549 529.92,-1559.92 J8.1@529.92,-1620.08 J8.1@533,-1617 ; v1(522,-1358) 522,-1338.58 ; U4.1@540.41,-1358 561.41,-1337 U4.1@562.99,-1338.58 ; U4.4@562.99,-1263.78 U4.1@562.99,-1338.58 ; C7.2@653.54,-661.42 653.54,-614.42 v1(657.48,-610.48) ; v1(661.42,-401.57) 689.16,-401.57 U1.8@711.48,-423.89 ; C10.2@759.84,-795.28 FB1.1@759.84,-755.91 767.72,-763.78 v1(787.4,-763.78) ; v1(787,-1492) 787.13,-1492.13 C21.2@874.02,-1492.13 874.02,-1472.44 885.83,-1460.63 C22.2@885.83,-1440.94 ; C23.2@826.77,-1342.52 855,-1342.52 ; v1(855,-1322) 855,-1342.52 ; C24.2@885.83,-1342.52 855,-1342.52 ; v1(899,-1216) 928.6,-1216 C8.2@929.13,-1216.54 ; C19.2@921.26,-1606.3 C20.2@980.31,-1606.3 ; v1@964.57,-1551.18 R26.2@988.19,-1551.18 988.19,-1578.74 980.31,-1586.61 C20.2@980.31,-1606.3 ; R26.2@990.16,-1551.18 R8.1@990.16,-1496.06 ; v1(1108.6,-1537.4) 1141.33,-1537.4 1141.73,-1537 ; v1(1110.24,-1433.07) C13.2@1141.73,-1433.07 1141.73,-1537 ; C15.2@1141.73,-1625.98 1141.73,-1600 ; C20.2@980.31,-1606.3 C18.2@1039.37,-1606.3 1055.12,-1606.3 1059.06,-1602.36 C17.2@1090.55,-1602.36 1139.37,-1602.36 1141.73,-1600 ; 1141.73,-1600 1141.73,-1537
  Top Layer w15.75: C50.1@47.24,-584.65 64.96,-584.65 125,-524.61 v1@125,-521
  Bottom Layer w8: v1(225,-700) 225,-724 225.41,-724.41 U3.100@242.13,-724.41 ; v1(271,-1258) 271.13,-1257.87 U3.75@303.15,-1257.87 ; U3.6@401.57,-663.39 v1@401.57,-613.57 ; U3.11@500,-663.39 v1@500,-615 ; U3.19@657.48,-663.39 v1(657.48,-610.48) ; v1(787.4,-763.78) U3.28@836.61,-763.78 ; U3.50@836.61,-1196.85 844,-1204.24 v1(844,-1218) ; U2.48@850.39,-1360.24 850.39,-1347.61 855,-1343 v1(855,-1322) ; v1@956.69,-1551.31 v1@960.5,-1555.12 ; v1(960.63,-1555.12) v1@960.5,-1555.12 ; U2.32@982.28,-1629.92 982.28,-1576.9 v1@960.5,-1555.12 ; v1@1108,-1538 v1(1108.6,-1537.4) U2.22@1173.23,-1537.4
  Bottom Layer w9.84: v2(1255,-1128) 1254.69,-1127.69 v2(1254.69,-865.69) 1254.69,-578.31 v2(1255,-578)
  Bottom Layer w12: v1(522,-1358) 553.76,-1389.76 R13.2@627.95,-1389.76 ; C44.2@633.86,-413.39 649.61,-413.39 665.35,-397.64 v1(661.42,-401.57)
3V3_ANA: C25.2 C26.2 FB1.2 R1.2 U3.22 | length 225
  Top Layer w6: R1.2@661.42,-755.91 C26.2@661.42,-795.28 C25.2@708.66,-795.28 FB1.2@708.66,-755.91 708.66,-740.16 720.47,-728.35 v1(720.47,-720.47)
  Bottom Layer w6: U3.22@716.54,-663.39 716.54,-716.54 v1(720.47,-720.47)
5V: C47.2 C49.1 J10.1 U5.14 | length 298
  Top Layer w20: C49.1@55.12,-293.31 116.31,-293.31 ; C47.2@112.2,-358.27 112.2,-297.41 116.31,-293.31 ; 123.82,-285.8 J10.1@123.82,-149.29 ; U5.14@150,-293.31 116.31,-293.31
"AUX GPIO0": J9.1 U3.35 | length 1274.4
  Top Layer w6: J9.1@145.67,-767.72 145.67,-828.67 203,-886 203,-956 235,-988 v1(316,-988)
  Bottom Layer w6: v1(316,-988) 397,-988 588,-1179 642,-1179 662,-1199 693.28,-1199 707.28,-1185 737.28,-1185 738.28,-1184 753.72,-1184 755.72,-1186 772.28,-1186 784,-1174.28 784,-1157.72 766,-1139.72 766,-1139.28 746,-1119.28 746,-919 763.43,-901.57 U3.35@836.61,-901.57
"AUX UART RX": J9.4 U3.97 | length 253.8
  Bottom Layer w6: J9.4@45.67,-667.72 98.95,-721 152.72,-721 166.72,-735 169,-735 192,-758 192,-774 201.46,-783.46 U3.97@242.13,-783.46
"AUX UART TX": J9.3 U3.98 | length 252.2
  Bottom Layer w6: J9.3@145.67,-667.72 152.95,-675 246,-675 288.24,-717.24 288.24,-757.76 282.22,-763.78 U3.98@242.13,-763.78
AUX_ANA0: TP11.1 U3.36 | length 73.9
  Bottom Layer w6: U3.36@836.61,-921.26 908.74,-921.26 TP11.1@910,-920
AUX_ANA1: TP12.1 U3.26 | length 78.5
  Bottom Layer w8: U3.26@836.61,-724.41 873.48,-724.41 TP12.1@902.89,-695
AUX_GPIO1: D3.1 U3.47 | length 1065.5
  Top Layer w6: D3.1@208.1,-1659.45 223.2,-1659.45 233.04,-1649.61 233.04,-1500 198,-1464.96 198,-1409 280.23,-1326.77 393.7,-1326.77 609.47,-1111 611.11,-1112.64 v1(784.18,-1112.64)
  Bottom Layer w6: v1(784.18,-1112.64) 784.18,-1122.61 783,-1123.8 797,-1137.8 U3.47@836.61,-1137.8
AUX_GPIO2: D4.1 U3.46 | length 1227.7
  Top Layer w6: D4.1@260.6,-1659.45 278.31,-1659.45 288.16,-1649.61 288.16,-1506.16 269,-1487 247,-1487 210,-1450 210,-1413.97 285.2,-1338.77 401.39,-1338.77 409.58,-1330.57 409.58,-1330.3 613.88,-1126 716.28,-1126 722.28,-1132 775.25,-1132 811.25,-1168 852,-1168 902,-1118 v1(902.11,-1118.11)
  Bottom Layer w6: U3.46@836.61,-1118.11 v1(902.11,-1118.11)
AUX_GPIO3: J12.1 U3.57 | length 399.1
  Top Layer w6: J12.1@354.33,-1429.13 356.33,-1429.13 396.46,-1389 v1(447,-1389)
  Bottom Layer w6: v1(447,-1389) 512,-1324 634,-1324 657.48,-1300.52 U3.57@657.48,-1257.87
AUX_GPIO4: J12.2 U3.59 | length 459.3
  Top Layer w6: J12.2@254.33,-1429.13 315.46,-1368 v1(427,-1368)
  Bottom Layer w6: v1(427,-1368) 445,-1368 507,-1306 612,-1306 618.11,-1299.89 U3.59@618.11,-1257.87
BOOT0: R11.2 S1.2 U3.94 | length 414.4
  Top Layer w6: S1.2@108.76,-1046.26 108.76,-914.37
  Bottom Layer w6: R11.2@109,-1002.7 v1(109,-960) 109,-861 127.48,-842.52 U3.94@242.13,-842.52
DMXL_OUTPUT_EN: R14.2 U3.69 U5.8 | length 1095.5
  Top Layer w6: U5.8@309.06,-295.28 309.06,-343.06 343,-377 343,-474 335,-482 335,-671.94 277,-729.94 277,-880.06 377,-980.06 377,-1118 v1(399,-1140) 399,-1170.31 R14.2@400,-1171.31
  Bottom Layer w6: v1(399,-1140) 421.26,-1162.26 U3.69@421.26,-1257.87
ETH_CTR: C42.2 R25.2 | length 49.7
  Bottom Layer w6: C42.2@1085.68,-834.67 R25.2@1085.68,-785
ETH_CTRG: R25.1 U7.11 | length 142.1
  Top Layer w6: U7.11@905,-785 906,-786 v2(1019,-786)
  Bottom Layer w6: v2(1019,-786) 1020,-785 R25.1@1046.31,-785
ETH_CTT: C29.2 R24.2 | length 50.1
  Bottom Layer w6: C29.2@1085.68,-884.33 1086.69,-885.33 R24.2@1086.68,-934
ETH_CTTG: R24.1 U7.14 | length 142.7
  Top Layer w6: U7.14@905,-935 v2(1023,-935)
  Bottom Layer w6: v2(1023,-935) 1046.32,-935 R24.1@1047.31,-934
ETH_MDC: U2.31 U3.16 | length 1260.4
  Top Layer w6: v1(664,-1159) 692.72,-1159 699.72,-1166 700.28,-1166 717,-1182.72 717,-1286 733,-1302 901,-1302 917,-1318 917,-1358.97 964,-1405.97 964,-1433 v1(978,-1447)
  Bottom Layer w6: U3.16@598.42,-663.39 598.43,-703.57 586,-716 586,-806 607,-827 607,-1068 665,-1126 664,-1127 v1(664,-1159) ; v1(978,-1447) 978,-1468 1001.97,-1491.97 U2.31@1001.97,-1629.92
ETH_MDIO: R8.2 U2.30 U3.25 | length 1290.5
  Top Layer w6: v1(708,-1146) 709,-1145 769.28,-1145 770.28,-1144 822.28,-1196 850.28,-1196 866,-1211.72 866,-1238.97 890.03,-1263 895.94,-1263 941,-1308.06 941,-1347.03 983.97,-1390 994,-1390 1016,-1412 1016,-1446 v1(1010,-1452) 1028,-1470 R8.2@1028,-1486.66
  Bottom Layer w6: v1(708,-1146) 708,-1112 647,-1051 647,-855 775.59,-726.41 ; 775.59,-723 775.59,-726.41 ; U3.25@775.59,-663.39 775.59,-726.41 ; v1(1010,-1452) 1021.65,-1463.65 U2.30@1021.65,-1629.92
ETH_RMII_CRS_DV: U2.40 U3.32 | length 997.7
  Top Layer w6: v1(905,-865) 847,-923 847,-1057 878,-1088 918,-1088 1027.87,-1197.87 1027.87,-1318.13 1027,-1319 v1(1027,-1366)
  Bottom Layer w6: U3.32@836.61,-842.52 882.52,-842.52 v1(905,-865) ; U2.40@850.39,-1517.72 942.91,-1517.72 957,-1503.63 957,-1421.72 982.86,-1395.86 1012.14,-1395.86 1027,-1381 v1(1027,-1366)
ETH_RMII_REF_CLK: U2.34 U3.24 U4.3 | length 1265.8
  Top Layer w6: U4.3@657.48,-1263.78 704.78,-1263.78 ; v1(684,-1179) 685,-1179 704.78,-1198.78 704.78,-1263.78 ; v1(909,-1538) 789,-1538 763,-1512 763,-1398 704.78,-1339.78 704.78,-1263.78
  Bottom Layer w6: v1(684,-1179) 684,-1119 685.14,-1117.86 632,-1064.72 632,-848 755.91,-724.09 U3.24@755.91,-663.39 ; v1(909,-1538) 909,-1538.28 942.91,-1572.2 U2.34@942.91,-1629.92
ETH_RMII_RXD0: U2.43 U3.33 | length 809.5
  Top Layer w6: v1(729,-1165) 811,-1247 v1(811,-1270)
  Bottom Layer w6: v1(729,-1165) 729,-1136.23 720,-1127.23 720,-902.03 759.82,-862.2 U3.33@836.61,-862.2 ; v1(811,-1270) 811,-1306 776,-1341 776,-1447 787.66,-1458.66 U2.43@850.39,-1458.66